# Altium PCB Adafruit PA1010D Mini GPS.PcbDoc
Units mil, origin at the board's own origin, x right, y up, seen from the top; angles counter-clockwise.
Board outline 1000 x 1000 mil, 2 copper layers (Top, Bottom); 27 components, 17 nets, 86 pads, 51 vias.
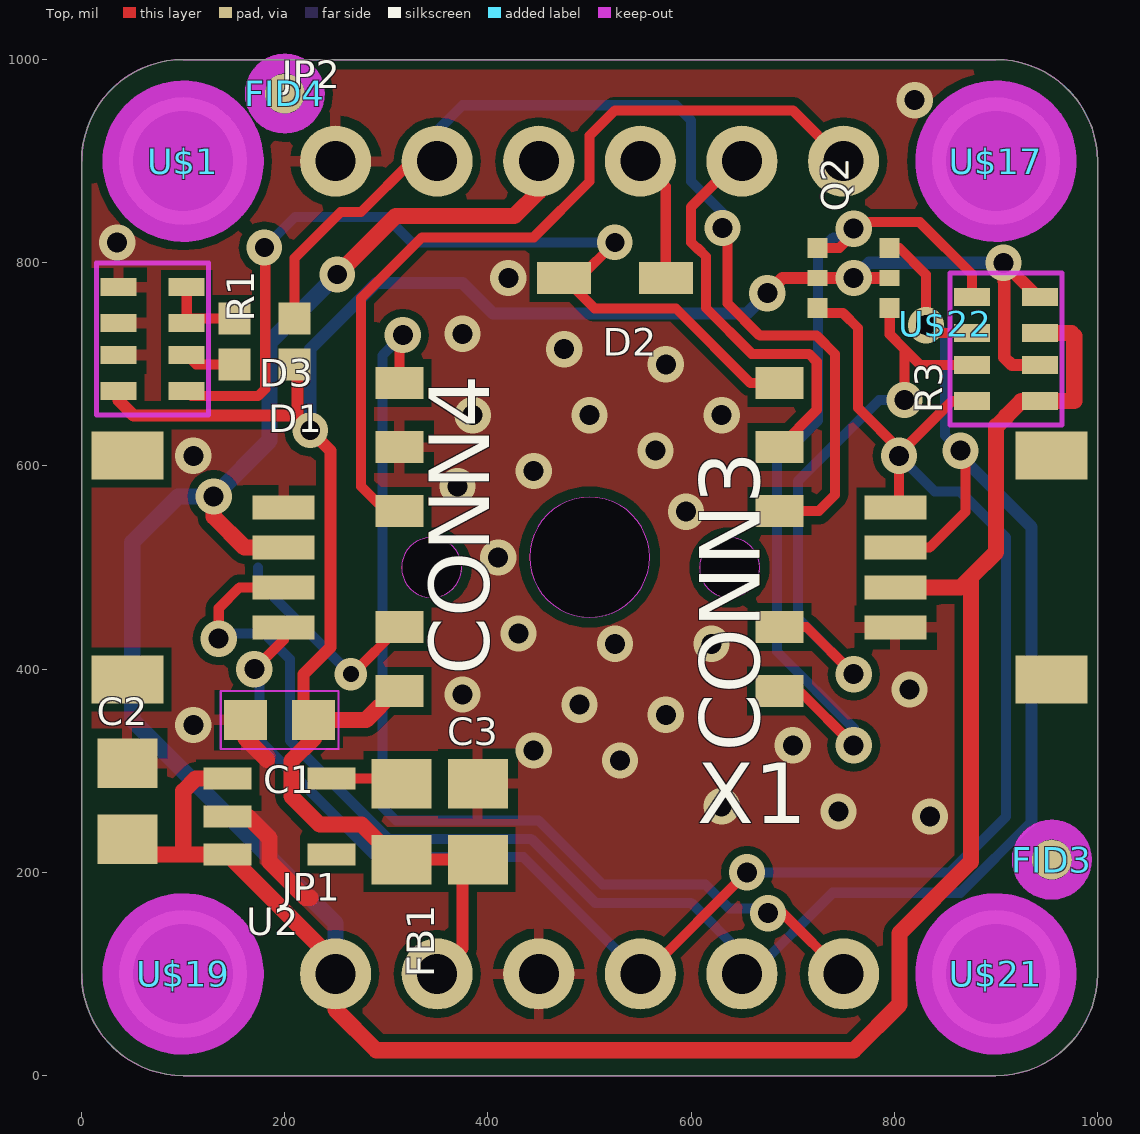
[diagram p0: Top view]
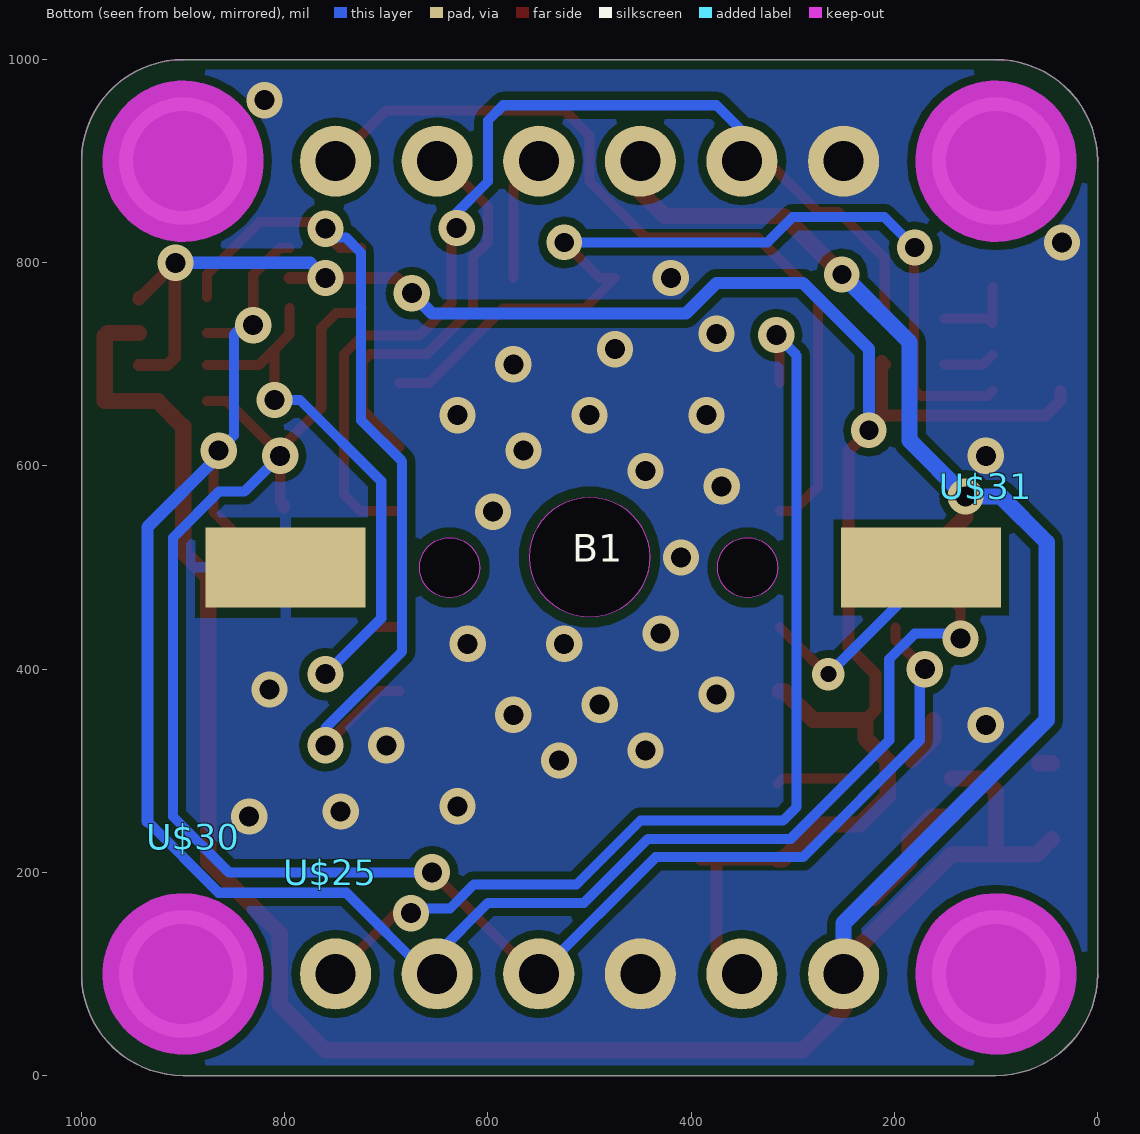
[diagram p1: Bottom view, seen from below]

## Layer stack, top to bottom
Top Solder: solder mask 0.4, Solder Resist, Dk 3.5
Top: signal copper 1.378
Dielectric 1: dielectric 12.6, FR-4, Dk 4.8
Bottom: signal copper 1.378
Bottom Solder: solder mask 0.4, Solder Resist, Dk 3.5

## Board outline
100,1000 ccw(c100,900) 0,900 0,100 ccw(c100,100) 100,0 900,0 ccw(c900,100) 1000,100 1000,900 ccw(c900,900) 900,1000
cut-out: 500,451.25 ccw(c500,510.31) 559.05,510.31 ccw(c500,510.31) 500,569.37 ccw(c500,510.31) 440.94,510.31 ccw(c500,510.31)
cut-out: 637.8,470.47 ccw(c637.8,500) 667.33,500 ccw(c637.8,500) 637.8,529.53 ccw(c637.8,500) 608.27,500 ccw(c637.8,500)
cut-out: 344.49,470.47 ccw(c344.49,500) 374.02,500 ccw(c344.49,500) 344.49,529.53 ccw(c344.49,500) 314.96,500 ccw(c344.49,500)

## Design rules (kind name [scope] priority, off if disabled: settings)
BoardOutlineClearance mdCopperDimension [All] p1: gap=10 ignorepadtopadclearanceinfootprint=FALSE except(0: Arc-SplitContinuation Track-SplitContinuation SMDPad-SplitContinuation THPad-SplitContinuation Via-SplitContinuation Fill-SplitContinuation Poly-SplitContinuation Region-SplitContinuation Text-SplitContinuation)
Clearance "Clearance (Same Net)" [All] p1: gap=8 ignorepadtopadclearanceinfootprint=FALSE
Clearance [All] p2: gap=8 ignorepadtopadclearanceinfootprint=FALSE
HoleSize HoleSize_For_NetClass_lowpower [InNetClass('lowpower')] p1: absolutevalues=TRUE maxlimit=19 minlimit=19 maxpercent=80.000 minpercent=20.000
HoleSize HoleSize_For_NetClass_highpower [InNetClass('highpower')] p2: absolutevalues=TRUE maxlimit=19 minlimit=19 maxpercent=80.000 minpercent=20.000
HoleSize [All] p3: absolutevalues=TRUE maxlimit=100000 minlimit=15.5 maxpercent=80.000 minpercent=20.000
HoleToHoleClearance mdDrill [All] p1: gap=8 allowstackedmicrovias=TRUE
MinimumSolderMaskSliver [All] p1 off: minsoldermaskwidth=10
PasteMaskExpansion Expansion_SMDPaste_OFF [InPadClass('SMDPaste_OFF')] p1: expansion=0
PasteMaskExpansion mlMinCreamFrame [All] p2: expansion=0
PolygonConnect PolygonConnect_For_PolygonThermal_ON_Width100000_Gap100000 [InPolygonClass('PolygonThermal_ON_Width100000_Gap100000') vs Not IsVia] p1: connectstyle=Relief reliefconductorwidth=10 reliefentries=4 polygonreliefangle="90 Angle" airgapwidth=10
PolygonConnect ThermalVias [IsVia] p2: connectstyle=Direct reliefconductorwidth=10 reliefentries=4 polygonreliefangle="90 Angle" airgapwidth=10
PolygonConnect [All] p3: connectstyle=Relief reliefconductorwidth=10 reliefentries=4 polygonreliefangle="90 Angle" airgapwidth=10
RoutingVias [All] p1: holewidth=15.5 width=31.5 viastyle="Through Hole" minholewidth=15.5 minwidth=31.5 maxholewidth=100 maxwidth=100
SolderMaskExpansion mlMinStopFrame [All] p1: expansion=2 istentingtop=FALSE
Width Width_For_NetClass_lowpower [InNetClass('lowpower')] p1: maxlimit=24 minlimit=10 preferedwidth=12
Width Width_For_NetClass_highpower [InNetClass('highpower')] p2: maxlimit=32 minlimit=10 preferedwidth=16
Width [All] p3: maxlimit=10 minlimit=8 preferedwidth=8
26 further rules are at their usual default settings.

## Classes and differential pairs
polygon class PolygonThermal_ON_Width100000_Gap100000: Polygon_1_Net_GND Polygon_2_Net_GND
pad class SMDPaste_OFF: FID3-1 FID4-1
net class lowpower: 3.3V
net class highpower: GND VCC

## Components (designator, comment, footprint, x,y, rotation, side; value= is the part's Value field where it differs from the comment)
B1 "" CR1220-2 500,500 r180 bottom
C1 "0.1uF" 0603-NO 195,350 r180 top
C2 "10uF" 0805-NO 45,270 r90 top
C3 "10uF" 0805-NO 390,250 r90 top
CONN3 "" JST_SH4 900,500 r90 top
CONN4 "" JST_SH4 100,500 r270 top
D1 "GREEN" CHIPLED_0603_NOOUTLINE 180,700 r90 top
D2 "1N4148" SOD-323 525,785 r180 top
D3 "RED" CHIPLED_0603_NOOUTLINE 180,745 r90 top
FB1 "FERRITE" 0805-NO 315,250 r270 top
FID3 "" FIDUCIAL_1MM 955,212.5 r0 top
FID4 "" FIDUCIAL_1MM 200,966.5 r0 top
JP1 "" 1X06_ROUND_70 500,100 r0 top
JP2 "" 1X06_ROUND_70 500,900 r0 top
Q2 "BSS138" SOT363 760,785 r90 top
R1 "10K" RESPACK_4X0603 70,725 r270 top
R3 "10K" RESPACK_4X0603 910,715 r90 top
U2 "AP2112K-3.3" SOT23-5 195,255 r270 top
U$1 "" MOUNTINGHOLE_2.5_PLATED 100,900 r0 top
U$17 "" MOUNTINGHOLE_2.5_PLATED 900,900 r0 top
U$19 "" MOUNTINGHOLE_2.5_PLATED 100,100 r0 top
U$21 "" MOUNTINGHOLE_2.5_PLATED 900,100 r0 top
U$22 "" ADAFRUIT_3.5MM 850,740 r180 top
U$25 "" PCBFEAT-REV-040 755,200 r180 bottom
U$30 "" STEMMAQT 890,235 r90 bottom
U$31 "" STEMMAQT 110,580 r270 bottom
X1 "GPS_PA1010D" GPS_PA1010D 500,530 r180 top

## Footprints (in the part's own frame and the unit in brackets; to place one, negate y for a bottom-side part, rotate by r counter-clockwise, add the part's x,y. Pads: shape width x height; smd on the part's side, far side on the other; paste and mask are expansions set on the pad)
1X06_ROUND_70 [mil] "1X06_ROUND_70"
  round 70 hole 39.37: 1(-250,0) 2(-150,0) 3(-50,0) 4(50,0) 5(150,0) 6(250,0)
  body extent -304,-35 285,35, height 150
0603-NO [mm] "0603-NO"
  rect 1.075x1 smd: 1(-0.85,0) 2(0.85,0)
  Top keep-out lines w0.051: 1.473,0.729 1.473,-0.729 -1.473,-0.729 -1.473,0.729 1.473,0.729
  body extent -1.5,-0.76 1.5,0.76, height 3.81
0805-NO [mil] "0805-NO"
  rect 48.82x59.06 smd: 1(-37.4,0) 2(37.4,0)
  body extent -62,-30 62,30, height 150
ADAFRUIT_3.5MM [mil] "ADAFRUIT_3.5MM"
CHIPLED_0603_NOOUTLINE [mil] "CHIPLED_0603_NOOUTLINE"
  rect 31.5x31.5 smd: A(0,-29.53) C(0,29.53)
  body extent -18,-45 18,45, height 150
CR1220-2 [mm] "CR1220-2"
  rect 4x2 smd: +(8.29,0) -(-7.6,0)
  body extent -9.6,-1 10.29,1, height 1.27
FIDUCIAL_1MM [mm] "FIDUCIAL_1MM"
  rrect100% 1x1 smd paste+0: 1(0,0)
  Top keep-out lines w0.5: -0.75,0 ccw(c0,0) 0,-0.75 ; -0.75,0 cw(c0,0) 0,0.75 ; -0.75,0 ccw(c0,0) 0,-0.75 ; -0.75,0 cw(c0,0) 0,0.75 ; 0,-0.75 ccw(c0,0) 0.75,0 ; 0,-0.75 ccw(c0,0) 0.75,0 ; 0,0.75 cw(c0,0) 0.75,0 ; 0,0.75 cw(c0,0) 0.75,0
  body extent -1.01,-1.01 1.01,1.01, height 3.81
GPS_PA1010D [mil] "GPS_PA1010D"
  rect 47.24x31.5 smd: 1(-187.01,151.57) 2(-187.01,88.58) 3(-187.01,-25.59) 4(-187.01,-88.58) 5(-187.01,-151.57) 6(187.01,-151.57) 7(187.01,-88.58) 8(187.01,-25.59) 9(187.01,88.58) 10(187.01,151.57)
  body extent -211,-167 211,167, height 50
JST_SH4 [mil] "JST_SH4"
  rect 23.62x61.02 smd: 1(-59.06,98.98) 2(-19.69,98.98) 3(19.69,98.98) 4(59.06,98.98)
  rect 47.24x70.87 smd: MT1(-110.24,-54.57) MT2(110.24,-54.57)
  body extent -134,-90 134,129, height 150
MOUNTINGHOLE_2.5_PLATED [mil] "MOUNTINGHOLE_2.5_PLATED"
  round 125.98 hole 98.43: P$1(0,0)
  Top keep-out circle w80: c0,0 r39.37
  Top keep-out circle w80: c0,0 r39.37
  Bottom keep-out circle w80: c0,0 r39.37
  Bottom keep-out circle w80: c0,0 r39.37
  body extent -80,-80 80,80, height 150
PCBFEAT-REV-040 [mil] "PCBFEAT-REV-040"
RESPACK_4X0603 [mil] "RESPACK_4X0603"
  rect 17.72x35.43 smd: 1(-51.18,-33.46) 2(-15.75,-33.46) 3(15.75,-33.46) 4(51.18,-33.46) 5(51.18,33.46) 6(15.75,33.46) 7(-15.75,33.46) 8(-51.18,33.46)
  Top keep-out lines w5: 74.8,-55.12 -74.8,-55.12 -74.8,55.12 74.8,55.12 74.8,-55.12
  body extent -78,-58 78,58, height 150
SOD-323 [mil] "SOD-323"
  rect 53.15x31.5 smd: A(50,0) C(-50,0)
  body extent -77,-32 77,32, height 150
SOT23-5 [mil] "SOT23-5"
  rect 21.65x47.24 smd: 1(-37.4,-51.19) 2(0,-51.19) 3(37.4,-51.19) 4(37.4,51.19) 5(-37.4,51.19)
  body extent -60,-75 60,75, height 150
SOT363 [mil] "SOT363"
  rect 19.69x19.69 smd: 1(-29.53,-35.43) 3(29.53,-35.43) 4(29.53,35.43) 6(-29.53,35.43)
  rect 15.75x19.69 smd: 2(0,-35.43) 5(0,35.43)
  body extent -44,-45 44,45, height 150
STEMMAQT [mil] "STEMMAQT"

## Part data
B1: library part CR1220-2, PackageName=CR1220-2
C1: library part 0603-NO, PackageName=0603-NO
C2 C3 FB1: library part 0805-NO, PackageName=0805-NO
CONN3 CONN4: library part JST_SH4, PackageName=JST_SH4
D1 D3: library part CHIPLED_0603_NOOUTLINE, PackageName=CHIPLED_0603_NOOUTLINE
D2: library part SOD-323, PackageName=SOD-323
FID3 FID4: library part FIDUCIAL_1MM, PackageName=FIDUCIAL_1MM
JP1 JP2: library part 1X06_ROUND_70, PackageName=1X06_ROUND_70
Q2: library part SOT363, PackageName=SOT363
R1 R3: library part RESPACK_4X0603, PackageName=RESPACK_4X0603
U2: library part SOT23-5, PackageName=SOT23-5
U$1 U$17 U$19 U$21: library part MOUNTINGHOLE_2.5_PLATED, PackageName=MOUNTINGHOLE_2.5_PLATED
U$22: library part ADAFRUIT_3.5MM, PackageName=ADAFRUIT_3.5MM
U$25: library part PCBFEAT-REV-040, PackageName=PCBFEAT-REV-040
U$30 U$31: library part STEMMAQT, PackageName=STEMMAQT
X1: PackageName=GPS_PA1010D

## Free pads (board coordinates)
  round 59.06 hole 59.06 unplated: MH1(344.49,500) MH2(637.8,500)
  round 118.11 hole 118.11 unplated: MH1(500,510.31)

## Via types
v1: diameter 35.69/35.69 (per signal layer), hole 19.69, Top to Bottom, 46 vias
v2: diameter 35/35 (per signal layer), hole 19, Top to Bottom, 4 vias
v3: diameter 31.75/31.75 (per signal layer), hole 15.75, Top to Bottom, 1 vias

## Nets (pads, with @x,y where several pads share a name; then routed paths per layer and width w, separated by ;. In a path a pad name is that pad's centre, name@x,y a point inside that pad or via, vN(x,y) a via of type N, cw(c..) or ccw(c..) an arc to the next point about the centre after c; other vN are vias at no path point)
1PPS: D3.A JP2.2 X1.3 | length 1057.1
  Top w10: D3.A 209.53,804.53 255,850 275,850 325,900 JP2.2 ; v1(630.84,834.16) 635.84,829.16 635.84,760.07 667.59,728.32 723.47,728.32 741.63,710.16 741.63,571.63 725.59,555.59 X1.3
  Bottom w10: JP2.2 350,930 375,955 585,955 600,940 600,880 630.84,849.16 v1(630.84,834.16)
3.3V: C1.1 C3.1 D1.A FB1.2 JP1.2 Q2.2 Q2.5 R1.4 R3.2 R3.4 X1.10 | length 2181.9
  Top w12: R1.4 36.54,664.37 51.23,649.68 210.32,649.68 212.5,647.5 ; D1.A 212.5,702.97 212.5,647.5 ; C1.1 218.46,360 218.46,395 245,421.54 245,615 v2(225,635) 212.5,647.5 ; FB1.2 C3.1@375,212.6 ; JP1.2 375,125 C3.1@375,212.6 ; C3.1 C3.1@375,212.6 ; v1(675,770) 690,785 Q2.5 v1(760,785) Q2.2 ; R3.2 915.75,699.25 908.25,706.75 908.25,780.84 907.5,781.59 v1(907.5,800) ; R3.4 941.32,766.18 v1(907.5,800) ; R3.4@943.75,763.75 v1(907.5,800)
  Top w16: X1.10 308.43,378.43 280,350 C1.1 228.46,331.76 206.56,309.86 206.56,274.95 234.52,246.99 275.61,246.99 310,212.6 FB1.2
  Bottom w12: v2(225,635) 225,715 290,780 375,780 405,750 655,750 v1(675,770) ; v1(760,785) 775,800 v1(907.5,800)
!RESET: JP1.6 X1.6 | length 1043.2
  Top w10: X1.6 312.99,725.62 v1(316.19,728.81) ; v1(675.69,159.87) 690.13,159.87 JP1.6
  Bottom w10: v1(316.19,728.81) 296.19,708.81 296.19,264.27 309.46,251 449.91,251 512.91,188 613.87,188 637.37,164.5 671.06,164.5 v1(675.69,159.87)
GND: B1.- C1.2 C2.2 C3.2 CONN3.1 CONN4.1 JP1.3 JP2.1 R1.1 R1.2 R1.3 U2.2 X1.7 | length 188.4
  Top w16: C2.2 C2.2@57.6,307.4 ; U2.2 163.49,255 185,233.49 185,210.35 220.35,175 225,175 ; C1.2 161.54,331.76 182.56,310.73
  other v1: 835,255 745,260 630,265 530,310 445,320 700,325 110,345 575,355 490,365 375,375 815,380 525,425 620,425 430,435 410,510 595,555 370,580 445,595 110,610 565,615 385,650 500,650 630,650 575,700 475,715 375,730 420,785 35,820 820,960
N$1: D1.C R1.6 | length 50.8
  Top w10: R1.6 112.72,700 D1.C
N$2: D3.C R1.7 R1.8 | length 84.2
  Top w10: R1.8 R1.7 107.72,745 D3.C
OUT: FB1.1 U2.5 | length 70.9
  Top w10: U2.5 310,292.4 FB1.1
RXI: D2.C JP2.4 | length 125.4
  Top w10: JP2.4 575,875 D2.C
RXI_3V: D2.A R1.5 X1.5 | length 908.9
  Top w10: R1.5 108.46,668.82 173.82,668.82 180.78,675.78 180.78,814.22 v2(180,815) ; v2(525,820) 490,785 D2.A 505,755 585,755 658.43,681.57 X1.5
  Bottom w10: v2(180,815) 210,845 300,845 325,820 v2(525,820)
SCL: CONN3.4 CONN4.4 JP1.4 Q2.6 R3.8 | length 1768
  Top w10: v1(170,400) 198.98,428.98 CONN4.4 ; JP1.4 555,100 v1(655,200) ; Q2.6 729.61,750.43 749.57,750.43 764.16,735.84 764.16,657.22 806.36,615.02 v1@806.36,613.64 ; CONN3.4@801.02,561.52 804.5,565 v1(804.5,610) 804.5,611.78 v1@806.36,613.64 ; R3.8 856.54,663.82 v1@806.36,613.64
  Top w12: CONN3.4 CONN3.4@801.02,561.52
  Bottom w10: v1(170,400) 175,395 175,330 290,215 435,215 JP1.4 ; v1(655,200) 855,200 910,255 910,529.5 864.5,575 839.5,575 v1(804.5,610)
SCL_3V: Q2.1 R3.7 X1.2 | length 612.7
  Top w10: X1.2 713.58,441.42 v1(760,395) ; Q2.1 795.43,729.57 810,715 ; v1(810,665) 810,715 ; R3.7 850,699.25 825.75,699.25 810,715
  Bottom w10: v1(760,395) 705,450 705,585 785,665 v1(810,665)
SDA: CONN3.3 CONN4.3 JP1.5 Q2.3 R3.6 | length 1994.2
  Top w10: v1(135,430) 135,460 155.32,480.32 CONN4.3 ; Q2.3 805.02,814.53 831.05,788.5 v1(831.05,738.5) 836.5,738.5 844.25,730.75 R3.6 ; CONN3.3 834.68,519.68 870,555 870,610 v1(865,615)
  Bottom w10: v1(135,430) 140,435 180,435 205,410 205,330 302,233 442.46,233 505.46,170 600,170 650,120 JP1.5 659.43,100 739.43,180 865,180 935,250 ; v1(831.05,738.5) 841.05,738.5 850,729.55 850,630 v1(865,615)
  Bottom w12: v1(865,615) 862.5,612.5 935,540 935,250
SDA_3V: Q2.4 R3.5 X1.1 | length 888.9
  Top w10: X1.1 706.57,378.43 v1(760,325) ; Q2.4 745.91,814.53 762.44,831.06 v1(760,833.5) 766.5,840 825,840 876.54,788.46 R3.5
  Bottom w10: v1(760,325) 760,341.87 684.5,417.37 684.5,604.5 725,645 725,810 740,825 760,825 v1(760,833.5)
TXO: JP2.5 X1.4 | length 404.9
  Top w10: JP2.5 645,900 600,855 600,820 606.25,813.75 606.96,813.75 614.57,806.13 614.57,755.43 659.68,710.32 716.01,710.32 723.63,702.71 723.63,655.2 X1.4
VBACKUP: B1.+ X1.9 | length 210.1
  Top w10: v3(265,395) 266.57,395 X1.9
  Bottom w10: B1.+ 173.62,486.38 v3(265,395)
VCC: C2.1 CONN3.2 CONN4.2 JP1.1 JP2.3 R3.1 R3.3 U2.1 U2.3 | length 3115.7
  Top w16: C2.1 60,217.6 90,217.6 100,217.6 ; v1(130,570) 130,550 160.32,519.68 CONN4.2 ; U2.1 112.4,292.4 100,280 100,217.6 ; v2(251.57,788.43) 309.13,846 426,846 450,870 JP2.3 ; CONN3.2 865.32,480.32 875.32,490.32 ; R3.3 974.25,730.75 977.18,727.82 977.18,663.82 R3.1 925,663.82 910.25,649.07 910.25,648.33 900.88,638.96 900.14,638.96 900,638.82 900,515 875.32,490.32 ; 100,217.6 U2.3 250,111.41 JP1.1 250,65 290,25 760,25 805,70 805,140 875.32,210.32 875.32,490.32
  Bottom w16: JP1.1 250,150 50,350 50,525 95,570 v1(130,570) 185,625 185,721.87 v2(251.57,788.43)
WAKEUP: JP2.6 X1.8 | length 831.8
  Top w10: X1.8 299.41,555.59 275,580 275,765 335,825 445,825 500,880 500,925 525,950 700,950 JP2.6
pads on no net: CONN3.MT1 CONN3.MT2 CONN4.MT1 CONN4.MT2 FID3.1 FID4.1 U2.4 U$1.P$1 U$17.P$1 U$19.P$1 U$21.P$1

## Polygon pours and split planes (outlines as drawn)
GND on Bottom "Polygon_1_Net_GND" (solid, remove dead copper, pour order 1): -5,1005 1005,1005 1005,-5 -5,-5
GND on Top "Polygon_2_Net_GND" (solid, remove dead copper, pour order 0): -5,1005 1005,1005 1005,-5 -5,-5

## Keep-outs
Keep-Out Layer:
  the board outline again, w0

## Silkscreen, mask and mechanical layers (free items; w line width, h text height)
Dimension:
  the board outline again, w0
tPlace:
  text "PPS" at 299.92,943.25 h34
  text "RXI" at 505.59,943.25 h34
  text "WAKE" at 682.93,938.25 h34
  text "GND" at 204.92,813.25 h34
  text "VIN" at 402.75,813.25 h34
  text "TXO" at 604.92,813.25 h34
  text "pps" at 148.76,804.74 h34
  text "ON" at 155.76,642.09 h34
  text "STEMMA MiniGPS" at 464.35,260.14 h38.25
  text "I2C+UART GNSS" at 467.47,197.91 h34
  text "SCL" at 499.92,143.25 h34
  text "Rst" at 705.59,143.25 h34
  text "3Vo" at 304.92,138.25 h34
  text "VIN" at 202.75,13.25 h34
  text "GND" at 399.92,13.25 h34
  text "SDA" at 604.92,13.25 h34
bPlace:
  text "UART" at 190,748.93 h34
  text "I2C" at 990,748.93 h34
  text "9600" at 190,688.93 h34
  text "Addr" at 990,688.93 h34
  text "BPS" at 190,628.93 h34
  text "0x10" at 990,628.93 h34

## Dimensions
520,0 to 485,1000 on tFinish
1000,360 to 0,250 on tFinish
900,100 to 100,100 on tFinish
500,100 to 500,900 on tFinish

## Text inside footprints (layer, text, board x,y; h text height)
CONN3: Top Value "JST SH 4" at 1057.72,368.9 h34 r90
CONN4: Top Value "JST SH 4" at -57.72,631.1 h34 r270
U$25: tPlace ">REV" at 769,180 h34